# Altium PCB BRK-r1-0-1.PCBDOC
Units mil, origin at the board's own origin, x right, y up, seen from the top; angles counter-clockwise.
Board outline 1840 x 1852.09 mil, 4 copper layers (Top, GND Plane, Mid1-Ver, Bottom), stack 61.6 mil thick; 40 components, 56 nets, 262 pads, 263 vias.
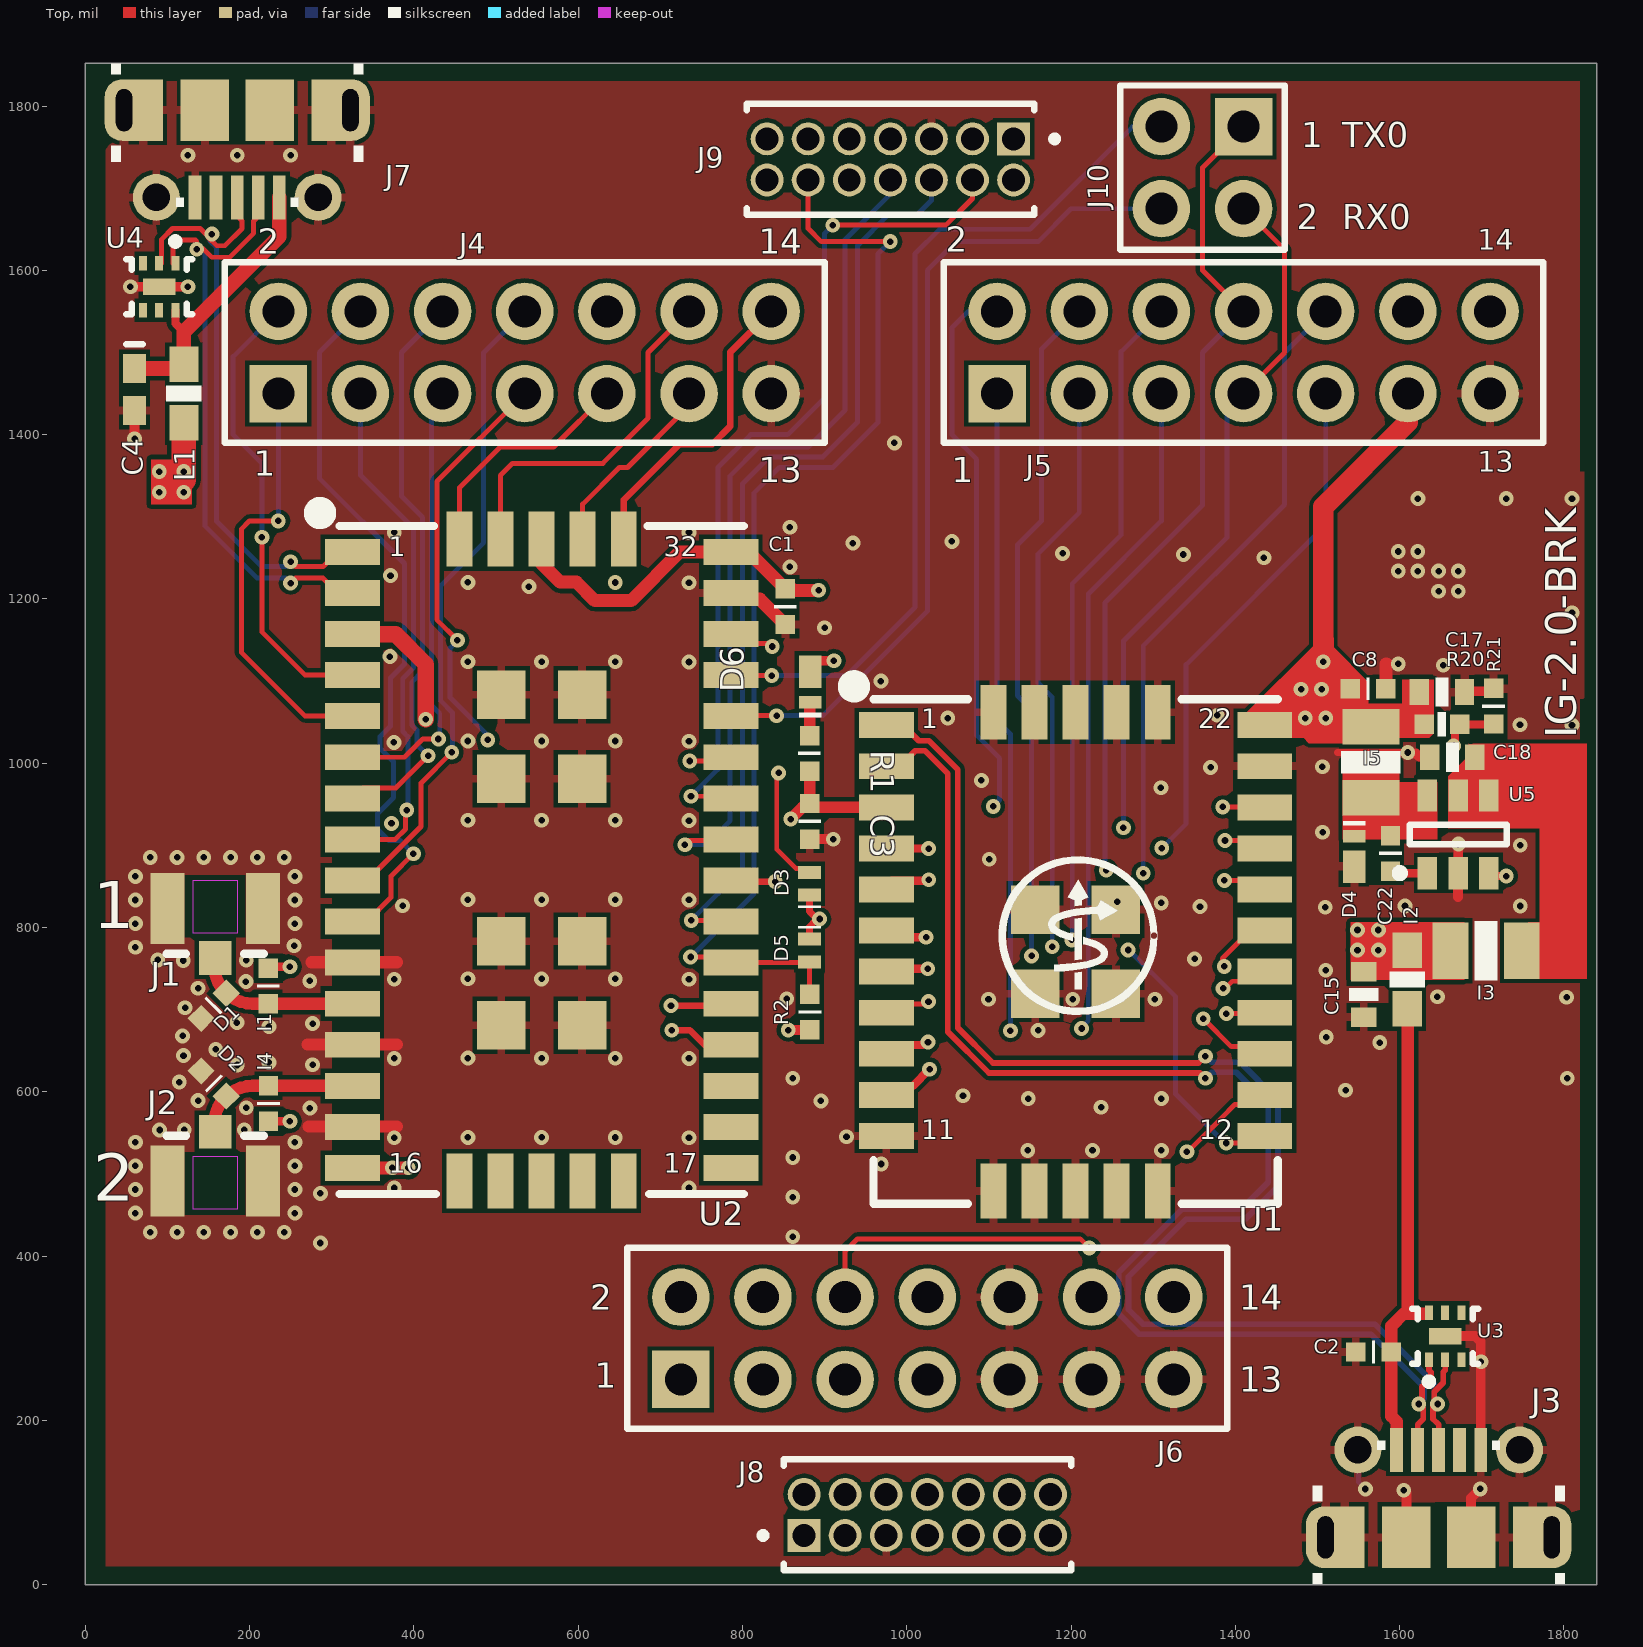
[diagram p0: Top view]
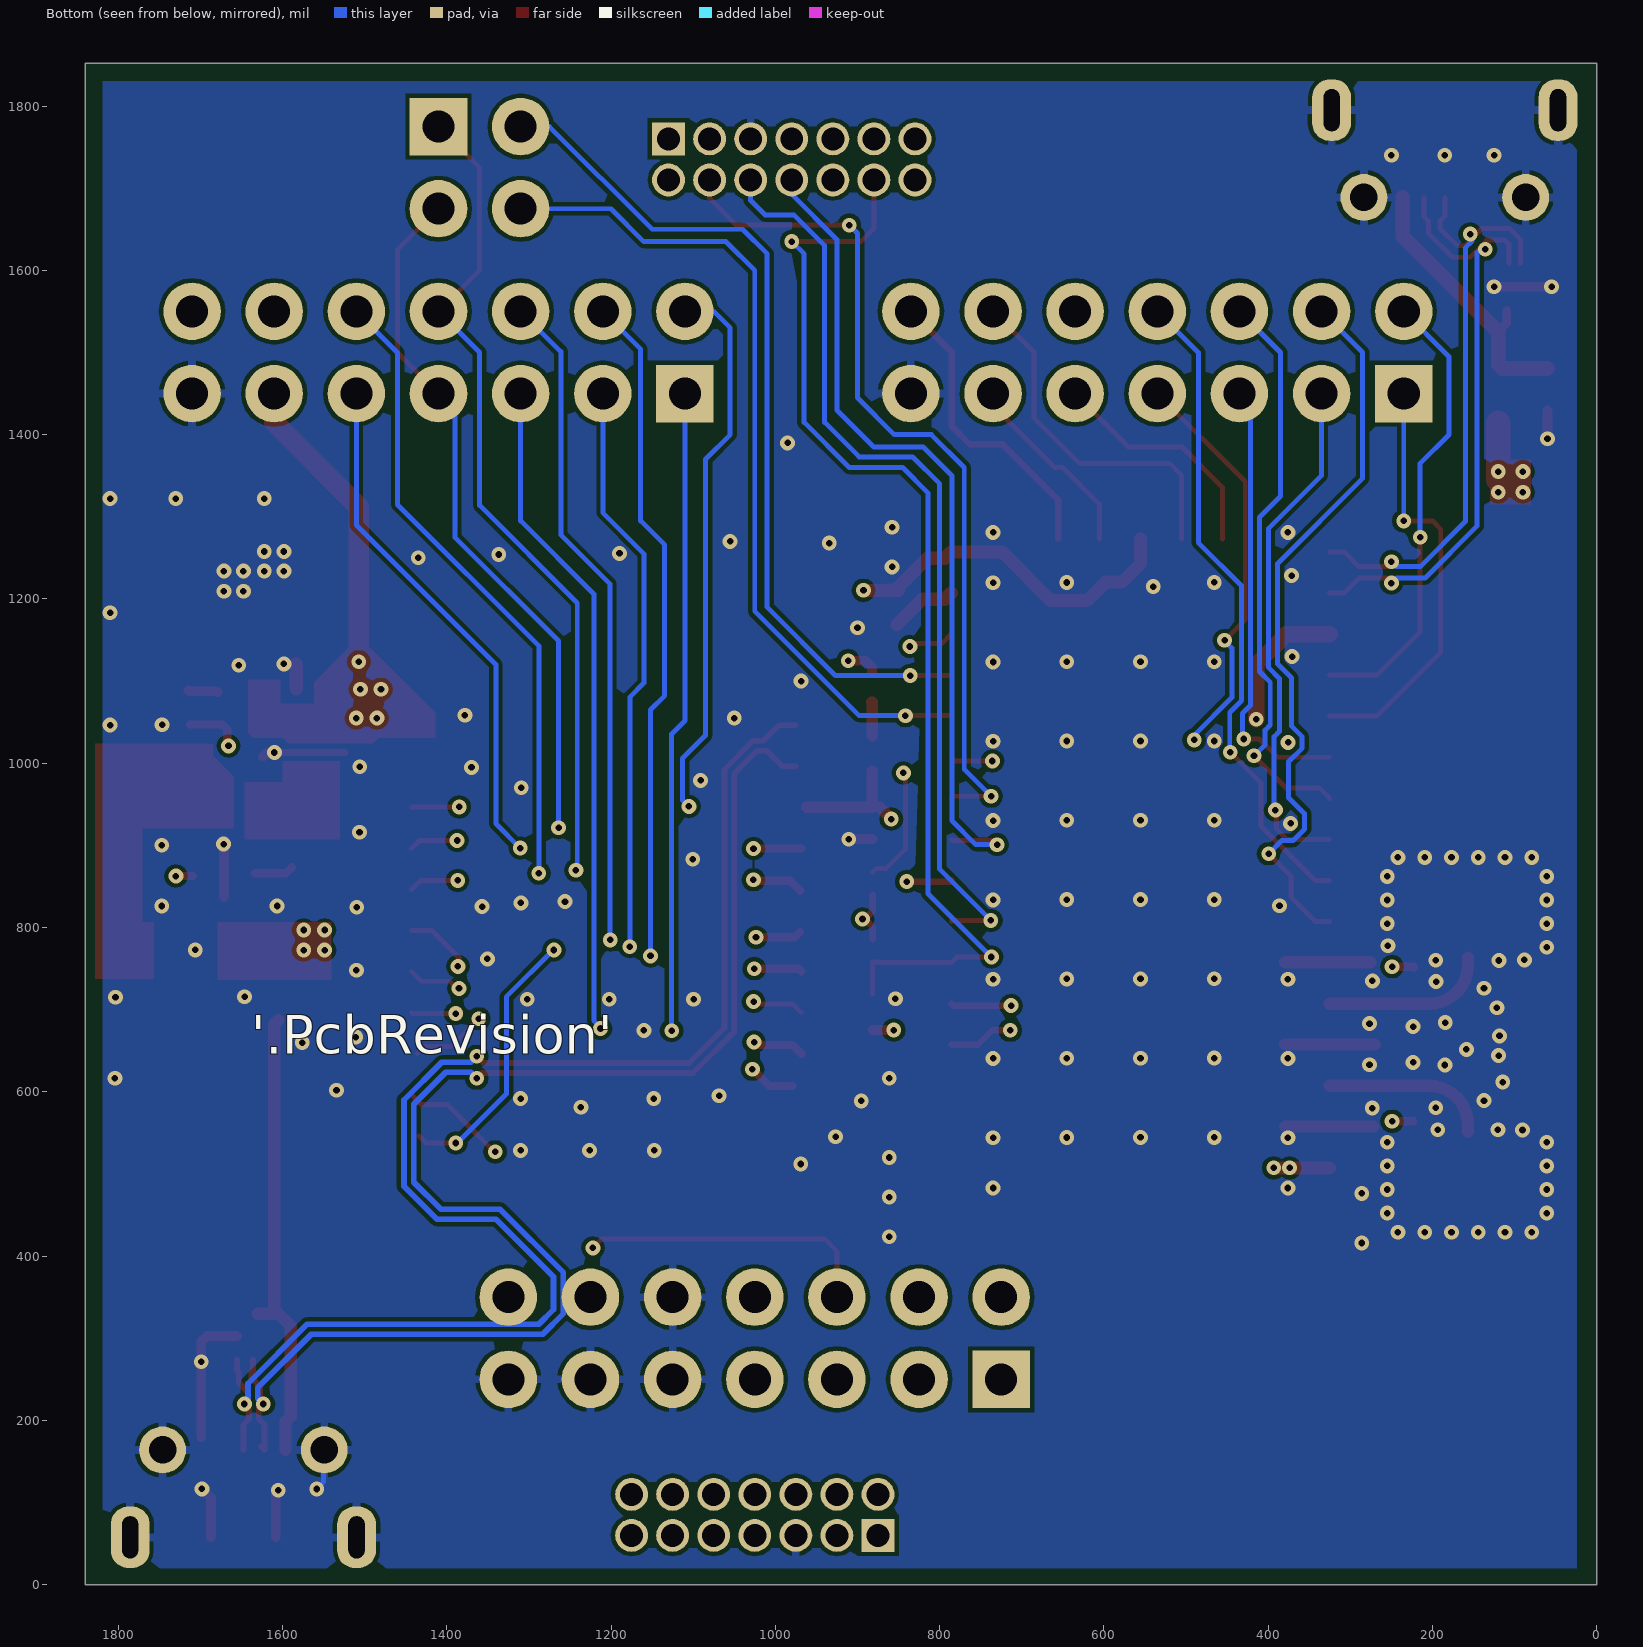
[diagram p1: Bottom view, seen from below]
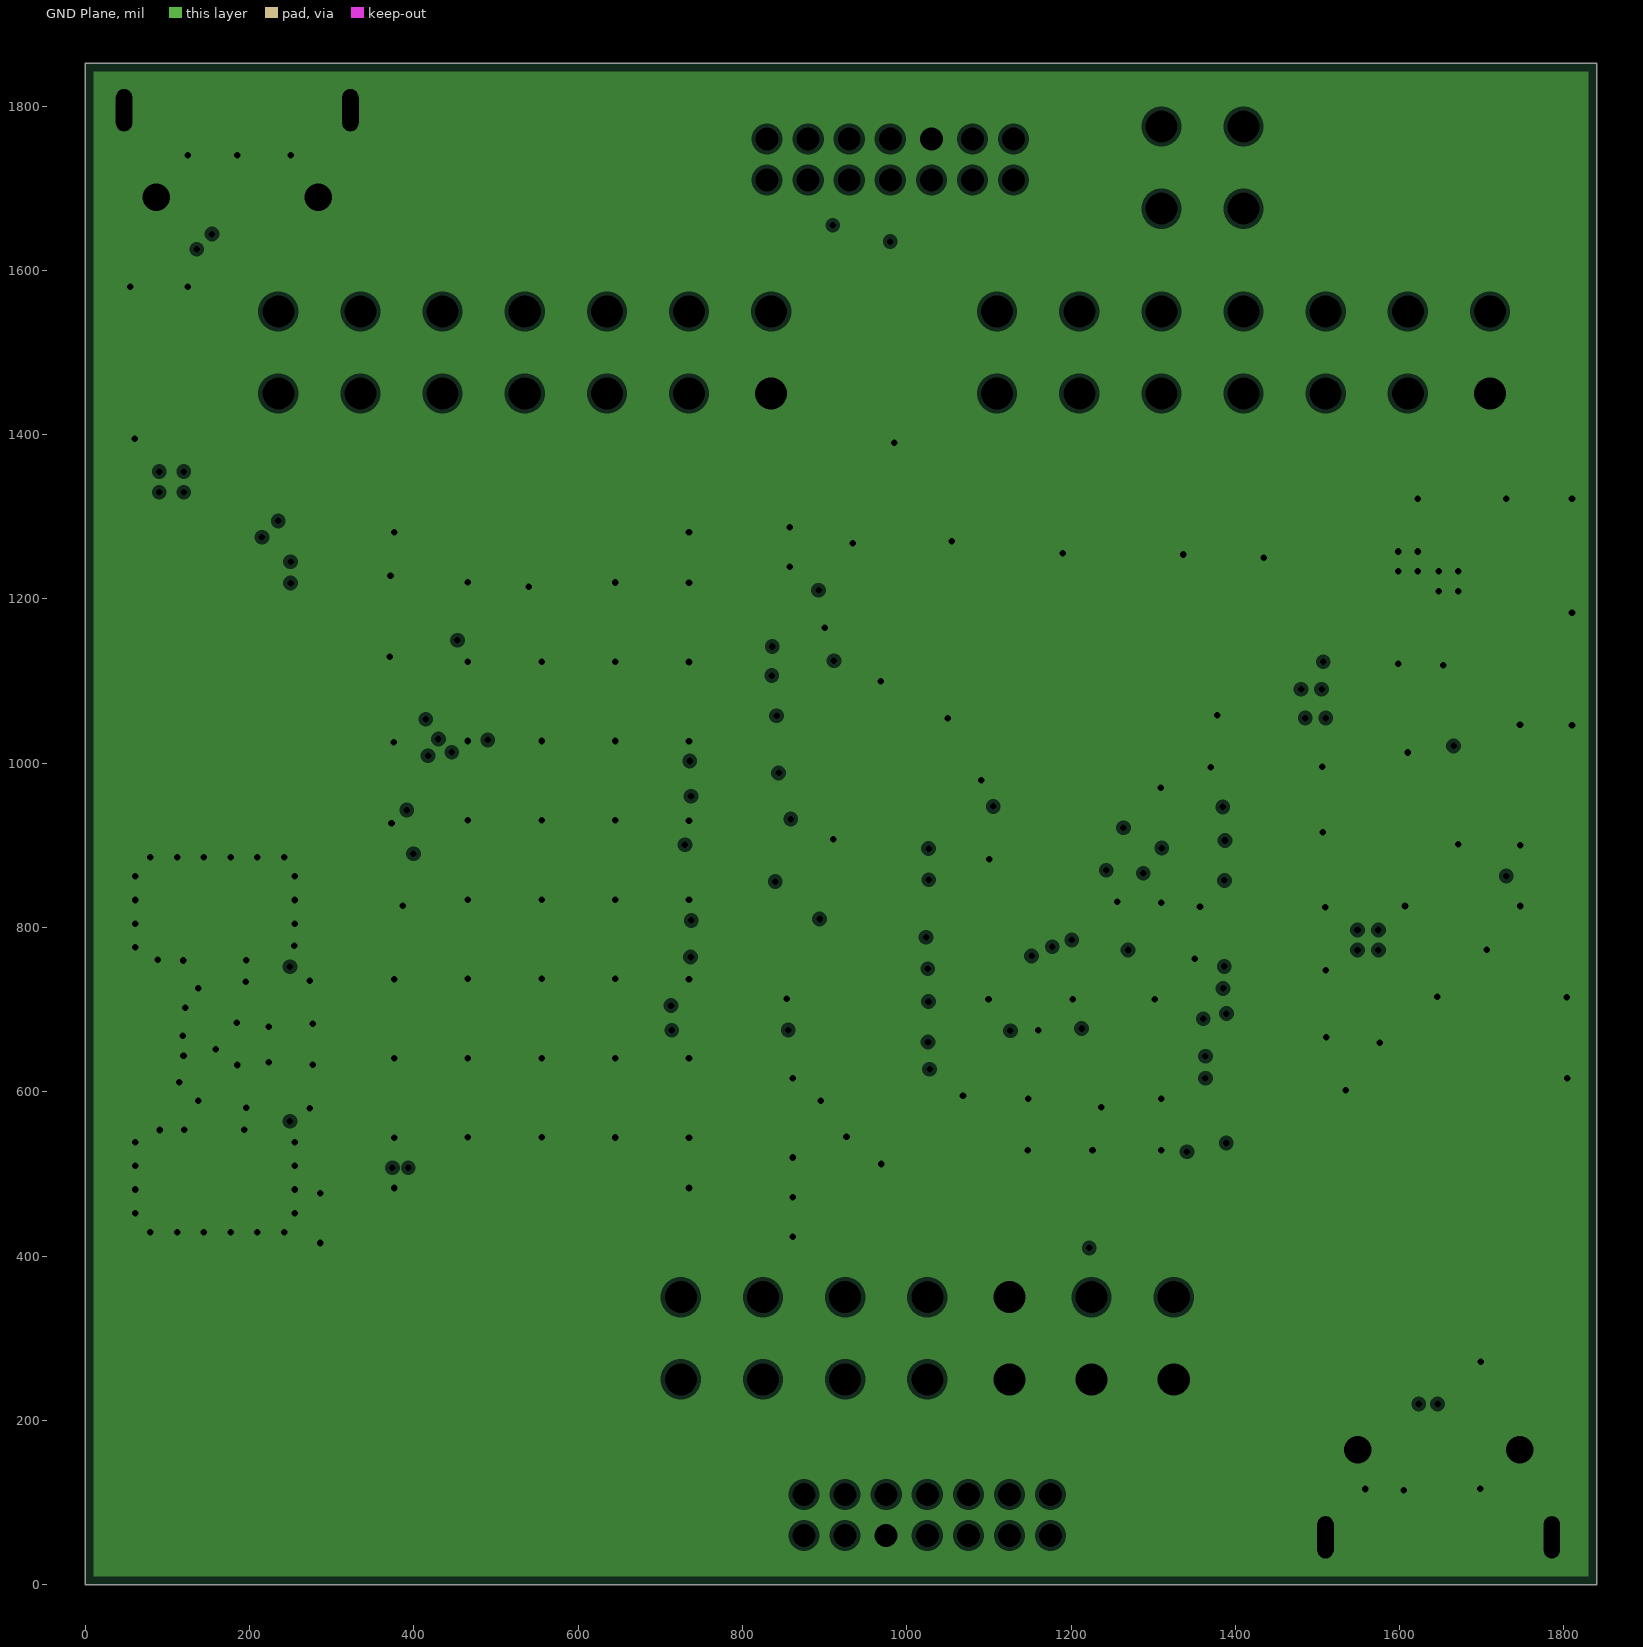
[diagram p2: GND Plane, clearances drawn from the general rule]
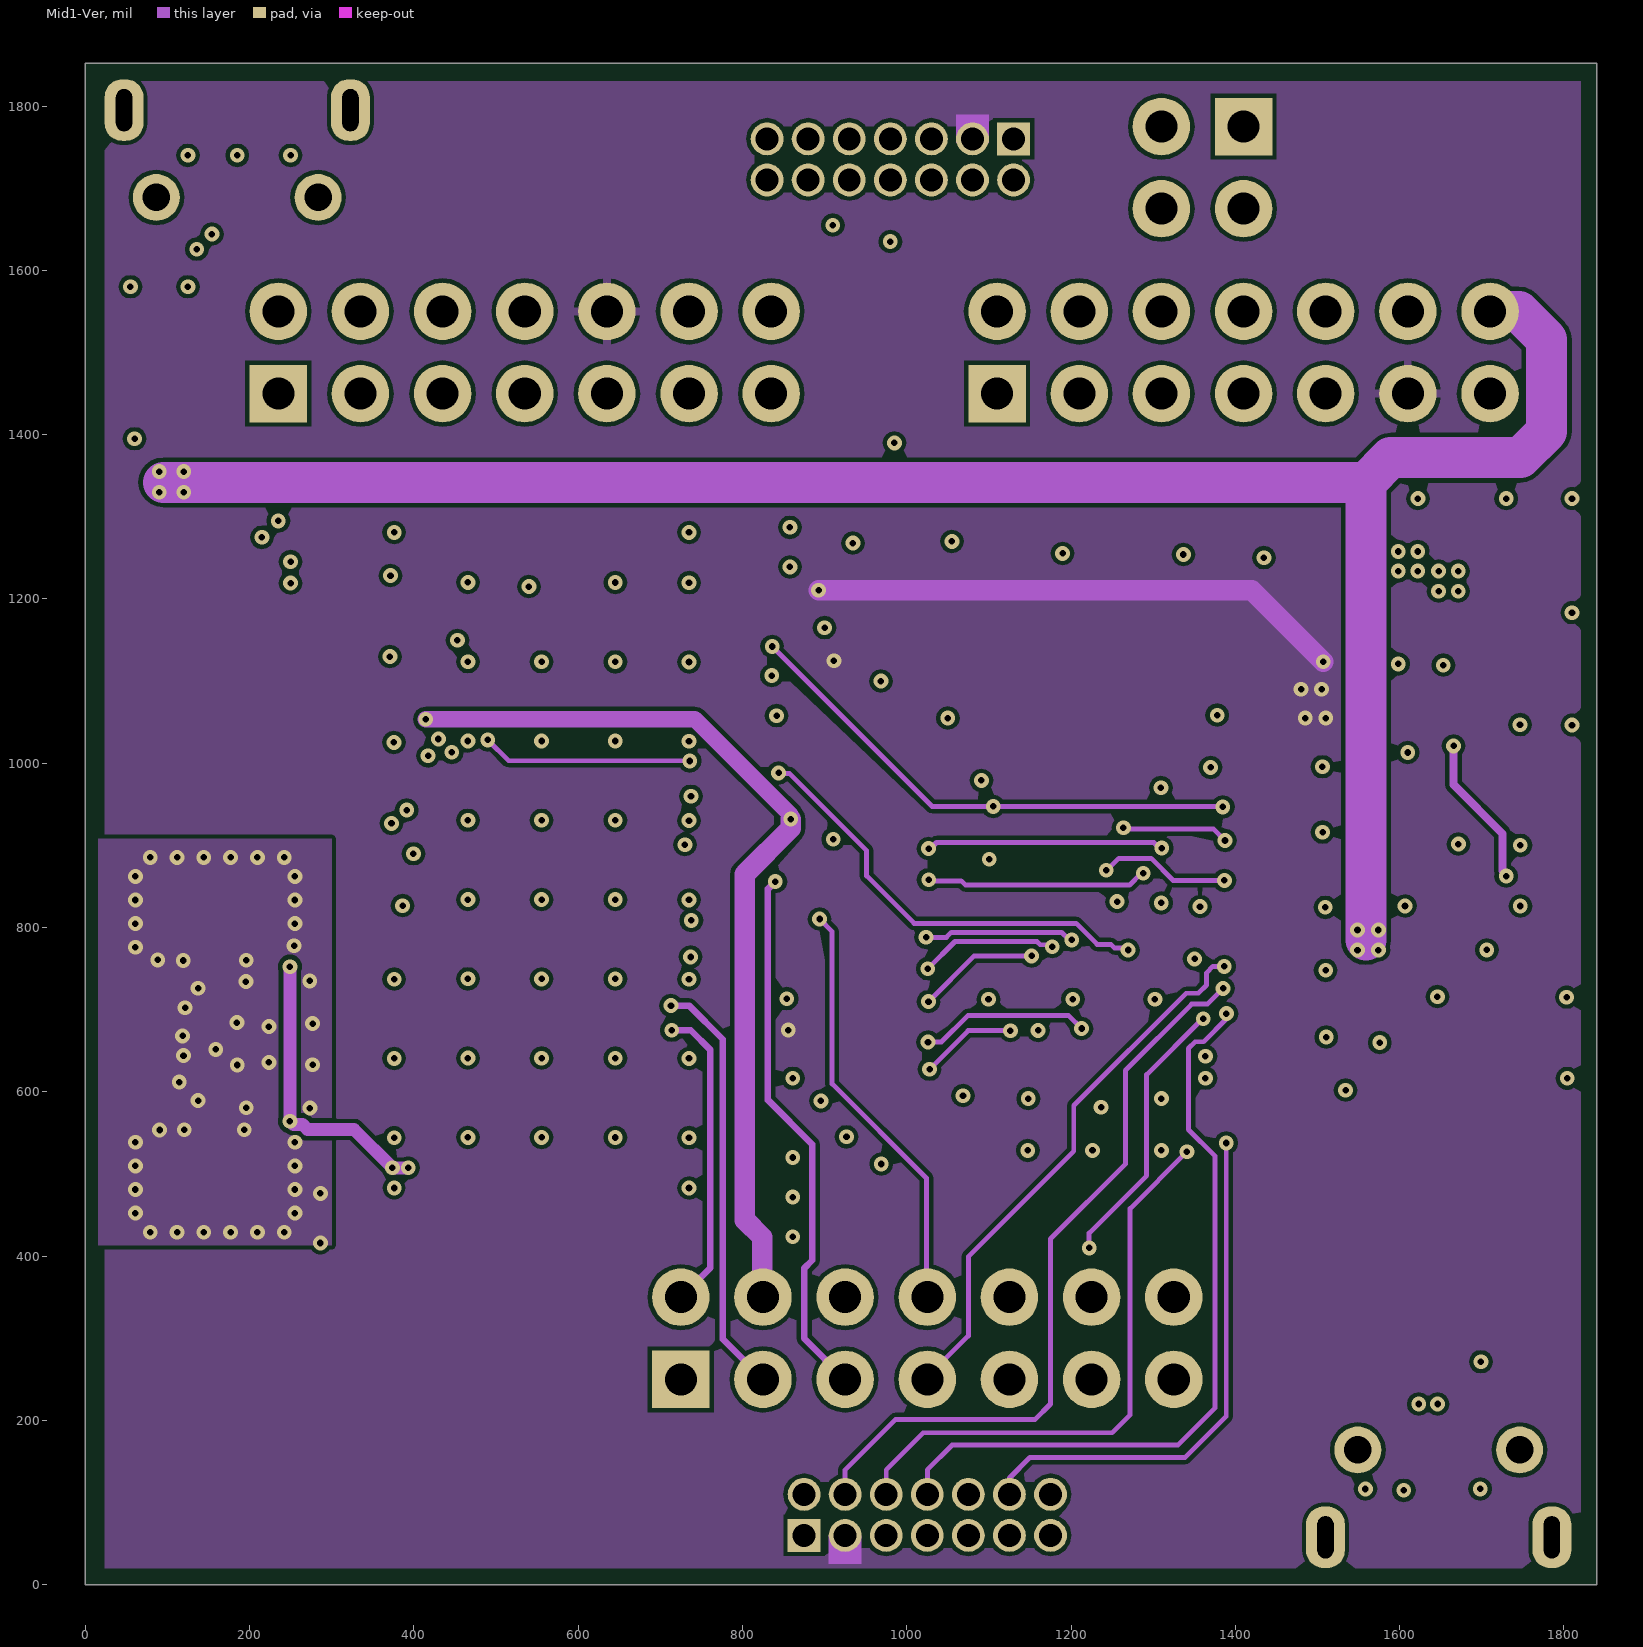
[diagram p3: Mid1-Ver]
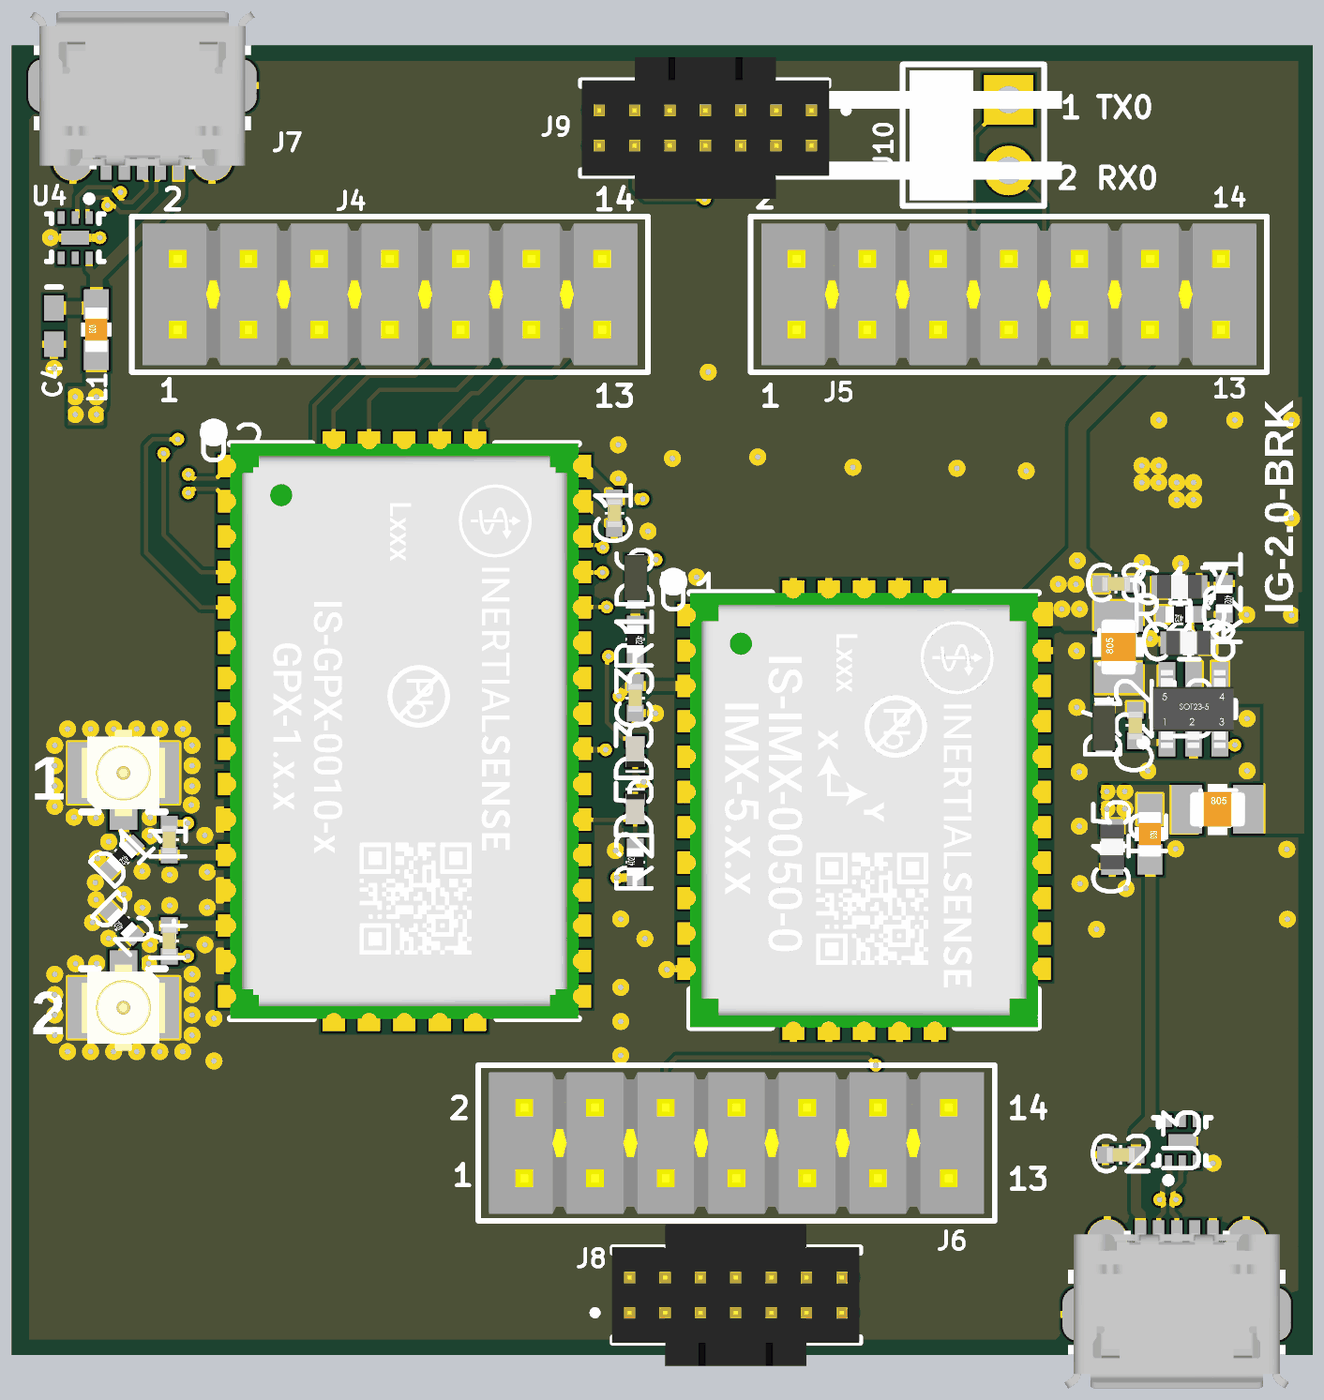
[diagram p4: 3D render of the assembled board from above, using the file's embedded part models]

## Layer stack, top to bottom
Top: signal copper 2.1
Dielectric: prepreg 8, PP-006, Dk 4.1
GND Plane: plane copper 0.7, net GND
Dielectric: core 40, Core-009, Dk 4.5
Mid1-Ver: signal copper 0.7
Dielectric: prepreg 8, PP-006, Dk 4.1
Bottom: signal copper 2.1

## Board outline
0,0 0,1852.09 1840,1852.09 1840,0

## Design rules (kind name [scope] priority, off if disabled: settings)
Clearance "Clearance - GPS Ant" [All vs InNet('GPS1_ANT')] p1: gap=8
Clearance [All] p2: gap=5
ComponentClearance Ignore [InComponent('H7')] p1: gap=-500 collisioncheckmode=3 verticalgap=-500 showdistances=FALSE
ComponentClearance HeaderClearance [InComponent('H1')] p2: gap=10 collisioncheckmode=3 verticalgap=-10 showdistances=FALSE
ComponentClearance Default [All] p3: gap=10 collisioncheckmode=3 verticalgap=10 showdistances=FALSE
DiffPairsRouting [All] p1: maxlimit=8 minlimit=4 mostfreqgap=5 maxuncoupledlength=500
HoleSize [All] p1: absolutevalues=TRUE maxlimit=200 minlimit=8 maxpercent=80.000 minpercent=20.000
HoleToHoleClearance [All] p1: gap=9 allowstackedmicrovias=TRUE
MinimumAnnularRing [All] p1: minimumring=4.5
MinimumSolderMaskSliver [All] p1: minsoldermaskwidth=3
PlaneClearance [All] p1: clearance=5
PlaneConnect "Power Plane Connect Style" [All] p1: planeconnectstyle=Direct reliefexpansion=20 reliefentries=4 reliefconductorwidth=7 reliefairgap=10
PolygonConnect [ISVIA] p1: connectstyle=Direct reliefconductorwidth=10 reliefentries=4 polygonreliefangle="90 Angle"
PolygonConnect "No Thermal Polygon Connect" [All vs InNamedPolygon('+1.8_L-01_P-002') or InNamedPolygon('GND_L01_P044') or InPolygonClass('NO THERMALS')] p2: connectstyle=Direct reliefconductorwidth=10 reliefentries=4 polygonreliefangle="90 Angle"
PolygonConnect "Default Polygon Connect" [All] p3: connectstyle=Relief reliefconductorwidth=10 reliefentries=4 polygonreliefangle="90 Angle"
RoutingCorners "Routing Corners Default" [All] p1: cornerstyle=45-Degree minsetback=100 maxsetback=100
RoutingLayers "Routing Layers Default" [All] p1: top layer_v5=TRUE mid layer 1_v5=TRUE bottom layer_v5=TRUE
RoutingPriority "Routing Priority Default" [All] p1: routingpriority=0
RoutingVias "Via Style Default" [All] p1: holewidth=8 width=18 viastyle="Through Hole" minholewidth=8 minwidth=18 maxholewidth=8 maxwidth=18
SilkToSilkClearance [Not ( ((ObjectKind = 'Text') And ((UseInvertedRectangle = 'True') OR (IsTextInverted = 'True'))) OR (ObjectKind = 'Fill') ) vs Not ( ((ObjectKind = 'Text') And ((UseInvertedRectangle = 'True') OR (IsTextInverted = 'True'))) OR (ObjectKind = 'Fill') )] p1: silktosilkclearance=0.98
SilkscreenOverComponentPads [NOT(IsPad AND OnLayer('Multi-Layer'))] p1: minsilkscreentomaskgap=0
SolderMaskExpansion SolderMaskExpansion_Via [IsVia] p1: expansion=-19.68
SolderMaskExpansion "Solder Mask Expansion" [All] p2: expansion=3
TestPointUsage FabricationTestPointUsage [All] p1 off: valid=0 allowmultiple=FALSE
Testpoint FabricationTestpoint [All] p1 off: side=3 testpointundercomponent=TRUE minsize=40 maxsize=100 preferedsize=60 minholesize=0 maxholesize=40 preferedholesize=32 testpointgrid=1 style=297 order=0123456789
Width "RF GPS" [InNetClass('RF_GPS')] p1: maxlimit=14.96 minlimit=14.88 preferedwidth=14.88
Width "Width Default" [All] p2: maxlimit=150 minlimit=3 preferedwidth=6
12 further rules are at their usual default settings.

## Classes and differential pairs
polygon class "NO THERMALS": RF_GND_L-01_P-001 RF_GND_L-03_P-001
net class RF_GPS: GNSS1_ANT GNSS2_ANT
differential pair class USB: USB.D
differential pair USB.D: +USB.D_P -USB.D_N
differential pair USBGPXD: +USBGPXD_P -USBGPXD_N

## Components (designator, comment, footprint, x,y, rotation, side; value= is the part's Value field where it differs from the comment)
C1 "Cap" 0402#1 852.28,1190.55 r270 top
C2 "Cap" 0402#1 1568.28,283.32 r180 top
C3 "Cap" 0402#1 881.89,929.36 r270 top
C4 "Cap" 0402#2 60,1455 r270 top
C8 "Cap" 0402#1 1561.52,1090.61 r0 top
C15 "Cap" 0603 1556.32,718.59 r270 top
C17 "Cap" 0603 1651.4,1086.69 r0 top
C18 "Cap" 0603 1664.04,1007.28 r180 top
C22 "Cap" 0402#1 1588.82,890.22 r90 top
D1 "Diode - Bidirectional Zener" R0402 156.22,704.72 r225 top
D2 "Diode - Bidirectional Zener" R0402 156.22,610.11 r135 top
D3 "Diode - Schottky" D0402 881.63,853.36 r90 top
D4 "Diode - Schottky" D0603B 1544.66,886.58 r270 top
D5 "Diode - Schottky" D0402 881.63,772.05 r270 top
D6 "Diode - Schottky" D0603B 882.51,1099.01 r90 top
I1 "Inductor" 0402#1 222.91,728.99 r270 top
I2 "Inductor" I0603 1609.3,736.68 r270 top
I3 "Inductor" 0806 1705.18,771.7 r0 top
I4 "Inductor" 0402#1 223.1,585.85 r90 top
I5 "Inductor" 0806 1565.1,1001.29 r90 top
J1 "RF - GND x 2" "RF UMC SMD" 158.12,823.23 r270 top locked
J2 "RF - GND x 2" "RF UMC SMD" 158.12,491.37 r90 top locked
J3 "USB-TYPEAB-4GND" "USB Micro AB R/A THR" 1647.51,57.75 r0 top
J4 "CONN-HDR2X7B 100MIL T/H" "CONN-HDR2X7V M" 535,1500 r90 top
J5 "CONN-HDR2X7B 100MIL T/H" "CONN-HDR2X7V M" 1410,1500 r90 top
J6 "CONN-HDR2X7B 100MIL T/H" "CONN-HDR2X7V M" 1025,300 r90 top
J7 "USB-TYPEAB-4GND" "USB Micro AB R/A THR" 185,1795 r180 top
J8 "CONN-HDR2X7 14P .050MIL T/H" "CONN-HDR2X7 .050 PITCH" 875,60 r0 top
J9 "CONN-HDR2X7 14P .050MIL T/H" "CONN-HDR2X7 .050 PITCH" 1130,1760 r180 top
J10 "CONN-HDR2X2A 100MIL T/H" "CONN-HDR2X2A .100MIL" 1360,1725 r270 top
L1 "Inductor" I0603 120,1450 r90 top
R1 "Res" R0402 881.89,1012.04 r270 top
R2 "Res" R0402 881.88,697.14 r90 top
R20 "Res" R0402 1651.4,1047.32 r180 top
R21 "Res" R0402 1714.66,1069.39 r270 top
U1 "IMX" IS-IMX-5.0 959.41,1077.83 r0 top locked
U2 "GPX" IS-GPX-1.0 309.43,1288.8 r0 top locked
U3 "VBUS053" QFN50P160X160X60-6N 1655.37,302.46 r90 top
U4 "VBUS053" QFN50P160X160X60-6N 90,1580 r270 top
U5 "ADP2301" MO-178-AB 1671.09,913.46 r90 top

## Footprints (in the part's own frame and the unit in brackets; to place one, negate y for a bottom-side part, rotate by r counter-clockwise, add the part's x,y. Pads: shape width x height; smd on the part's side, far side on the other; paste and mask are expansions set on the pad)
0402#1 [mm]
  rect 0.6x0.6 smd: 1(-0.55,0) 2(0.55,0)
  silkscreen extent -0.05,-0.35 0.05,0.35, body extent -0.5,-0.25 0.5,0.25, height 0.51
0402#2 [mm] "Chip Capacitor; Body 1.0 x 0.5 mm (LxW typ)"
  rect 0.9x0.7 smd: 1(-0.65,0) 2(0.65,0)
  silkscreen extent -1.4,-0.25 -1.4,0.25
0603 [mm]
  rect 0.6x0.8 smd: 1(-0.7,0) 2(0.7,0)
  silkscreen extent -0.2,-0.45 0.2,0.45, body extent -0.8,-0.43 0.8,0.43, height 0.87
0806 [mm]
  rect 1.1x1.75 smd: 1(-1.1,0) 2(1.1,0)
  silkscreen extent -0.35,-0.92 0.35,0.92, body extent -1,-0.62 1,0.63, height 0.78
"CONN-HDR2X2A .100MIL" [mil] "CONN-HDR2X2A .100MIL MALE JUMPER"
  rect 70x70 hole 39: 1(-50,50)
  round 70 hole 39: 2(50,50) 3(-50,-50) 4(50,-50)
  silkscreen extent -100,-100 100,100, body extent -92,-96 92,96, height 408
"CONN-HDR2X7 .050 PITCH" [mil]
  rect 40x40 hole 27.95: 1(0,0)
  round 40 hole 27.95: 2(0,50) 3(50,0) 4(50,50) 5(100,0) 6(100,50) 7(150,0) 8(150,50) 9(200,0) 10(200,50) 11(250,0) 12(250,50) 13(300,0) 14(300,50)
  silkscreen extent -54,-43 325,93, body extent -26,-75 324,125, height 225
"CONN-HDR2X7V M" [mil] "Header 2X7 Verticle .100 Samtec Male"
  rect 70x70 hole 39: 1(-50,300)
  round 70 hole 39: 2(50,300) 3(-50,200) 4(50,200) 5(-50,100) 6(50,100) 7(-50,0) 8(50,0) 9(-50,-100) 10(50,-100) 11(-50,-200) 12(50,-200) 13(-50,-300) 14(50,-300)
  silkscreen extent -110,-365 110,365, body extent -100,-350 100,350, height 330
D0402 [mm]
  rect 0.4x0.7 smd: A(0.35,0) C(-0.35,0)
  silkscreen extent -0.76,-0.35 -0.68,0.35, body extent -0.55,-0.33 0.55,0.33, height 0.56
D0603B [mm] "Molded Diode, 2-Leads, Body 1.60x0.80mm, IPC Medium Density"
  rect 1.005x0.69 smd: A(0.312,0)
  rect 0.385x0.69 smd: C(-0.625,0)
  silkscreen extent -1.1,-0.35 -0.95,0.35, body extent -0.86,-0.42 0.86,0.42, height 0.45
I0603 [mm]
  rect 1.1x0.9 smd: 1(-0.9,0) 2(0.9,0)
  silkscreen extent -0.25,-0.55 0.25,0.55, body extent -0.8,-0.4 0.8,0.4, height 0.3
IS-GPX-1.0 [mm] "Inerial Sense GPX-1.0, 42pins 1.27mm pitch"
  rect 1.5x1.5 smd: 0(5,-15.435) 0(5,-12.835) 0(5,-7.815) 0(5,-5.215) 0(7.5,-15.435) 0(7.5,-12.835) 0(7.5,-7.815) 0(7.5,-5.215)
  rect 1.7x0.8 smd paste-2.54: 1(0.4,-0.8) 2(0.4,-2.07) 3(0.4,-3.34) 4(0.4,-4.61) 5(0.4,-5.88) 6(0.4,-7.15) 7(0.4,-8.42) 8(0.4,-9.69) 9(0.4,-10.96) 10(0.4,-12.23) 11(0.4,-13.5) 12(0.4,-14.77) 13(0.4,-16.04) 14(0.4,-17.31) 15(0.4,-18.58) 16(0.4,-19.85) 17(12.1,-19.85) 18(12.1,-18.58) 19(12.1,-17.31) 20(12.1,-16.04) 21(12.1,-14.77) 22(12.1,-13.5) 23(12.1,-12.23) 24(12.1,-10.96) 25(12.1,-9.69) 26(12.1,-8.42) 27(12.1,-7.15) 28(12.1,-5.88) 29(12.1,-4.61) 30(12.1,-3.34) 31(12.1,-2.07) 32(12.1,-0.8)
  rect 0.8x1.7 smd paste-2.54: 33(3.71,-20.25) 34(4.98,-20.25) 35(6.25,-20.25) 36(7.52,-20.25) 37(8.79,-20.25) 38(8.79,-0.4) 39(7.52,-0.4) 40(6.25,-0.4) 41(4.98,-0.4) 42(3.71,-0.4)
  silkscreen extent -0.85,-20.65 12.5,0.65, body extent 0,-20.65 12.5,0, height 2.88
IS-IMX-5.0 [mm] "Inerial Sense IMX-5.0, 22pins 1.27mm pitch"
  rect 1.5x1.5 smd: 0(5,-9.1) 0(5,-6.5) 0(7.5,-9.1) 0(7.5,-6.5)
  rect 1.7x0.8 smd paste-2.54: 1(0.4,-0.8) 2(0.4,-2.07) 3(0.4,-3.34) 4(0.4,-4.61) 5(0.4,-5.88) 6(0.4,-7.15) 7(0.4,-8.42) 8(0.4,-9.69) 9(0.4,-10.96) 10(0.4,-12.23) 11(0.4,-13.5) 12(12.1,-13.5) 13(12.1,-12.23) 14(12.1,-10.96) 15(12.1,-9.69) 16(12.1,-8.42) 17(12.1,-7.15) 18(12.1,-5.88) 19(12.1,-4.61) 20(12.1,-3.34) 21(12.1,-2.07) 22(12.1,-0.8)
  rect 0.8x1.7 smd paste-2.54: 23(3.71,-15.2) 23(4.98,-15.2) 23(6.25,-15.2) 23(7.52,-15.2) 23(8.79,-15.2) 24(3.71,-0.4) 24(4.98,-0.4) 24(6.25,-0.4) 24(7.52,-0.4) 24(8.79,-0.4)
  silkscreen extent -0.85,-15.6 12.5,0.65, body extent 0,-15.6 12.5,0, height 2.89
MO-178-AB [mm] "SOT23, 6-Leads, Body 3.0x2.8mm (max), Pitch 0.95mm, IPC Medium Density"
  rect 1x0.6 smd: 1(-1.2,0.95) 2(-1.2,0) 3(-1.2,-0.95) 4(1.2,-0.95) 5(1.2,0) 6(1.2,0.95)
  silkscreen extent -1.32,-1.5 0.3,1.92, body extent -1.4,-1.45 1.41,1.45, height 1.12
QFN50P160X160X60-6N [mm] "QFN, 6-Leads, Body 1.6x1.6mm (max), Pitch 0.50mm, IPC Medium Density"
  rect 0.45x0.25 smd: 1(-0.725,0.5) 2(-0.725,0) 3(-0.725,-0.5) 4(0.725,-0.5) 5(0.725,0) 6(0.725,0.5)
  rect 0.5x1 smd: 7(0,0)
  silkscreen extent -1.5,-1.02 0.85,1.02, body extent -0.82,-0.82 0.82,0.82, height 0.6
R0402 [mm]
  rect 0.6x0.6 smd: 1(-0.55,0) 2(0.55,0)
  silkscreen extent -0.05,-0.36 0.05,0.34, body extent -0.5,-0.3 0.5,0.3, height 0.2
"RF UMC SMD" [mm] "Ultra Miniature Coaxial Surface Mount"
  rect 1.05x1 smd: 1(1.525,0)
  rect 2.2x1.05 smd: 2(0,-1.475) 3(0,1.475)
  Top pour cut-out: -1.05,0.95 -1.05,-0.95 0.9,-0.95 0.9,0.95
  Top keep-out region: -0.85,0.7 -0.85,-0.7 0.75,-0.7 0.75,0.7
  silkscreen extent 1.4,-1.5 1.4,1.5, body extent -1.55,-1.5 1.55,1.5, height 1.3
"USB Micro AB R/A THR" [mm] "USB Micro AB R/A Through Hole"
  rect 0.4x1.35 smd: 1(-1.3,2.7) 2(-0.65,2.7) 3(0,2.7) 4(0.65,2.7) 5(1.3,2.7)
  rrect90% 1.2x1.9 hole 0.5 slot 1.3 at 90 deg paste-2539.97 mask+0.076: 6(-3.5,0)
  rect 1.2x1.9 smd: 6(-2.9,0) 7(2.9,0)
  round 1.45 hole 0.85 mask+0.102: 6(-2.5,2.7) 7(2.5,2.7)
  rrect90% 1.2x1.9 hole 0.5 slot 1.3 at 90 deg mask+0.076: 7(3.5,0)
  rect 1.5x1.9 smd: 8(-1,0) 9(1,0)
  silkscreen extent -3.9,-1.45 3.9,3, body extent -4.02,-2.65 4.03,2.92, height 2.69

## Part data
C1 C2 C4 C8: "CAP CER .10UF 50V X7R 10% 0402"
C3: "0402 2.2 uF 6.3 V ±10% Tolerance X6S Multilayer Ceramic Capacitor"
C15 C18: "CAP CER 2.2UF 25V X6S 0603"
C17: "CAP CER 22UF 6.3V X6S 0603"
C22: "CAP CER 0.1UF 50V X7R 0402"
D1 D2: "LITTELFUSE - PESD0402-140 - DIODE, ESD PROTECTION, 0402, FULL REEL"
D3 D5: "CDBQR0130L; SMT Schottky Diode; 35V 100mA; 2-Pin SOD-923F (0402)"
D4 D6: "DIODE SCHOTTKY 30V 2A 0603"
I1 I4: "Inductor RF Chip Wirewound 120nH 5% 100MHz 20Q-Factor 110mA 2.66Ohm DCR 0402 Paper T/R"
I2 L1: "FERRITE CHIP 220 OHM 2500MA 0603"
I3 I5: "FIXED IND 2.2UH 1.2A 110 MOHM"
J1 J2: "CONN UMC RCPT STR 50 OHM SMD"
J3 J7: "CONN USB AB 4POS"
J10: "CONN-HDR2X2A 100MIL MALE T/H"
R1 R2: "1 kOhms ±1% 0.063W, 1/16W Chip Resistor 0402 (1005 Metric) Moisture Resistant Thick Film"
R20: "RES TF 30.9K OHM 1% 1/16W 0402"
R21: "RES 10.0K OHM 1/16W 1% 0402 SMD"
U1: library part IS-IMX-5.0, "Inertial Sense IMX"
U2: library part IS-GPX-1.0, "Inertial Sense GPX"
U3 U4: "ESD SUPPRESS 5.5V 36W 3-Line USB"
U5: "IC BUCK ADJ 1.2A 6TSOT"

## Via types
v1: diameter 18, hole 8, Top to Bottom, 263 vias

## Nets (pads, with @x,y where several pads share a name; then routed paths per layer and width w, separated by ;. In a path a pad name is that pad's centre, name@x,y a point inside that pad or via, vN(x,y) a via of type N, cw(c..) or ccw(c..) an arc to the next point about the centre after c; other vN are vias at no path point)
+3.3V: C1.1 C8.1 C17.1 D6.A I5.2 J4.10 J5.11 J8.3 J9.3 R2.1 R20.2 U1.22 U2.32 U2.40 | length 1561.6
  Top w12: v1(855.83,675.2) 855.97,675.34 881.73,675.34 R2.1 ; D6.A 882.51,1117.22 890.09,1124.8 v1(911.34,1124.8)
  Top w16: U2.40 555.49,1242.93 577.95,1220.47 597.95,1220.47 620.4,1198.02 664.48,1198.02 723.76,1257.31 U2.32 793.55,1249.56 814.93,1249.56 C1.1 ; C1.1@850.16,1210.55 C1.1@863.53,1210.55 ; C1.1@863.4,1210.29 863.53,1210.42 892.57,1210.42 v1(892.7,1210.55)
  Top w25: C8.1 v1(1507,1123.47) 1507,1312 1610,1415 J5.11
  Mid1-Ver w25: v1(892.7,1210.55) 1419.93,1210.55 v1(1507,1123.47)
  other v1: 1485,1055 1510,1055 1480,1090 1505,1090
FB: R20.1 R21.2 U5.3 | length 274.8
  Top w10: v1@1665.44,1020.9 1665.44,1023.06 1667.21,1024.84 1667.21,1041.48 R20.1 R21.2@1712.43,1047.32 ; U5.3@1708.81,862.58 v1(1729.68,862.58)
  Mid1-Ver w10: v1(1665.61,1021.07) 1665.61,973.86 1725.28,914.18 1725.28,869.14 1729.68,864.74 v1(1729.68,862.58)
G1/Rx2/RxCAN/SCL: J5.9 U1.4 | length 985
  Top w6: v1@1309.71,897.38 v1(1310.37,896.73)
  Top w10: U1.4@968.27,896.33 968.46,896.13 v1(1026.54,896.13)
  Mid1-Ver w6: v1(1026.54,896.13) 1028.75,896.13 1036.22,903.6 1300.79,903.6 1307.66,896.73 v1(1310.37,896.73)
  Bottom w6: v1(1310.37,896.73) 1340,926.36 1340,1120 1510,1290 J5.9
G2/Tx2TxCAN/SDA/STROBE: J5.10 U1.5 | length 1108.1
  Top w10: U1.5@969.69,844.9 981.87,857.08 1025.6,857.08 v1(1026.69,858.17)
  Mid1-Ver w6: v1(1026.69,858.17) 1027.96,856.89 1066.35,856.89 1071.35,851.89 1228.1,851.89 1228.25,851.75 1271.26,851.75 1285.66,866.16 v1(1287.86,866.16)
  Bottom w6: v1(1287.86,866.16) 1287.86,1142.86 1460,1315 1460,1500 J5.10
G5/SCLK/STROBE: J5.5 U1.9 | length 1083.4
  Top w6: v1@1212.6,677.28 v1(1212.81,677.08)
  Top w10: U1.9@968.27,646.33 979.01,657.08 1020.2,657.08 1023.72,660.6 v1(1025.89,660.6)
  Mid1-Ver w6: v1(1025.89,660.6) 1042.04,660.6 1074.29,692.85 1197.04,692.85 v1(1212.81,677.08)
  Bottom w6: v1@1212.81,677.49 1212.81,678.64 1220.94,686.76 1220.94,1205.94 1310,1295 J5.5
G6/Rx1/MOSI: J5.6 U1.6 | length 1050.3
  Top w10: U1.6@969.85,794.75 976.52,788.08 v1(1023.51,788.08)
  Mid1-Ver w6: v1(1023.51,788.08) 1048.24,788.08 1054.24,794.08 1188.44,794.08 1197.59,784.93 v1(1200.83,784.93)
  Bottom w6: v1(1200.83,784.93) 1201.44,785.54 1201.44,1218.44 1261,1278 1261,1501 J5.6
G7/Tx1/MISO: J5.3 U1.7 | length 927.5
  Top w10: U1.7@968.27,746.33 971.85,749.92 v1(1025.64,749.92)
  Mid1-Ver w6: v1@1026.13,749.92 1026.13,750.41 1058.8,783.08 1158.36,783.08 1162.4,779.04 1174.82,779.04 v1(1177.11,776.75)
  Bottom w6: v1(1177.11,776.75) 1177.11,1080.54 1160,1097.65 1160,1255 1210,1305 J5.3
G8/C\S\/STROBE: J5.4 U1.8 | length 1036.1
  Top w6: U1.8@968.27,696.33 979.01,707.08 1021.48,707.08 1024.27,709.86 v1(1026.43,709.86)
  Mid1-Ver w6: v1@1025.35,709.86 v1(1026.43,709.86) 1082.07,765.5 v1(1151.9,765.5)
  Bottom w6: v1(1151.9,765.5) 1151.9,1065.07 1134.79,1082.17 1134.79,1265.79 1164,1295 1164,1504 J5.4
G9/S\P\I\_\E\N\/STROBE: J5.1 U1.10 | length 957.3
  Top w10: U1.10@979.01,607.08 1007.39,607.08 v1(1027.86,627.55)
  Mid1-Ver w6: v1(1027.86,627.55) 1074.8,674.48 v1(1126.15,674.48)
  Bottom w6: J5.1 1110,1051.78 1126.15,1035.63 v1(1126.15,674.48)
G10/CHIP_ERASE: J6.7 U1.17 | length 752.3
  Top w6: v1(1386.42,752.67) 1384.5,754.58 1384.5,762.5 1384.37,762.63 1418.07,796.33 U1.17@1442.68,796.33
  Mid1-Ver w6: J6.7 1025,253 1075,303 1075,399.37 1203.3,527.67 1203.3,583.3 1340,720 1355,720 1365,730 1365,745 1372.67,752.67 v1(1386.42,752.67)
G11/SWDIO: J8.4 U1.16 | length 983.3
  Top w6: v1(1385.07,725.93) 1387.78,725.93 1396.44,734.58 1430.93,734.58 U1.16@1442.68,746.33
  Mid1-Ver w6: J8.4 925,140 986,201 1156,201 1175,220 1175,421 1266.03,512.03 1266.03,626.03 1346.71,706.71 1365.85,706.71 v1(1385.07,725.93)
G12/SWO: J8.8 U1.15 | length 983.8
  Top w6: v1(1389.1,695.21) 1441.56,695.21 U1.15@1442.68,696.33
  Mid1-Ver w6: J8.8 1025,140 1055,170 1330,170 1375,215 1375,522 1343,554 1343,653 1351,661 1361.5,661 1389.1,688.6 v1(1389.1,695.21)
G13/DRDY/XSDA: J6.6 U1.14 | length 794.2
  Top w6: J6.6 925,406 940,421 1211.09,421 v1(1222.09,410) ; v1(1361,689) 1361.76,689 1361.76,688.24 1395,655 1427.12,655 U1.14
  Mid1-Ver w6: v1(1222.09,410) 1222.09,428.07 1292.03,498.02 1292.03,621.03 1358.47,687.47 1360.06,687.47 1361,688.41 v1(1361,689)
G14/SWCLK: J8.6 U1.13 | length 835.1
  Top w6: v1(1341,527) 1342.14,527 1382.65,567.51 1382.65,567.84 1399.39,584.58 1430.93,584.58 U1.13@1442.68,596.33
  Mid1-Ver w6: J8.6 975,140 1020,185 1250,185 1271.86,206.86 1271.86,457.86 v1(1341,527) v1@1342.14,527
GND: C1.2 C2.2 C3.2 C4.2 C8.2 C15.2 C17.2 C18.2 D1.2 D2.2 D4.A J1.2 J1.3 J2.2 J2.3 J3.5 J3.6 J3.7 J3.8 J3.9 J4.13 J5.13 J6.9 J6.10 J6.11 J6.13 J7.5 J7.6 J7.7 J7.8 J7.9 J8.5 J9.5 R21.1 U1.0 U1.11 U1.21 U1.23 U1.24 U2.0 U2.11 U2.13 U2.15 U2.31 U3.7 U4.7 U5.2 | length 1098.7
  Top w6: v1@925.85,544.52 v1(926.62,545.29)
  Top w9: 1524.36,1013.08 v1@1612.63,1013.08
  Top w11.81: v1(1609.75,1013.08) 1610.94,1011.89 1619.91,1011.89 1623.85,1007.95
  Top w12: v1(55,1580) U4.7 v1(125,1580) ; v1(60,1395) C4.2 ; C3.2 910.32,907.71 v1(910.55,907.48) ; v1@1605,115 1608.14,111.86 J3.8 ; U3.7 1655.83,302.92 1691.71,302.92 1698.74,295.89 J3.5@1698.74,179.74 ; 1671.09,837.33 U5.2 1671.32,866.45 1671.32,901.41 v1(1671.55,901.65) ; C17.2 1679.95,1087.68 1713.41,1087.68 R21.1@1714.4,1088.66 ; J3.9 1686.88,105.54 v1(1698.02,116.68)
  Top w14.88: 270.39,657.78 379.25,657.78 ; 271.97,557.78 379.25,557.78 ; 275.51,757.78 379.25,757.78
  Top w16: U2.31 793.55,1199.56 821.23,1199.56 C1.2@852.09,1168.7 ; C8.2 1583.17,1120.74 1583.9,1120.74
  Bottom w6: J3.6@1550.12,154.69 1550.12,124.79 v1(1558.32,116.59)
  other v1: 1605.01,115 1698.85,271.45 286.19,415.96 861.34,423.62 79.13,429.16 111.73,429.16 144.33,429.16 176.93,429.16 209.53,429.16 242.13,429.16 61.02,452.36 255.21,452.36 861.34,471.85 286.19,476.39 61.02,481.1 255.21,481.1 376.02,482.95 734.96,482.95 61.02,509.84 255.21,509.84 969.04,512.21 861.34,520.08 1147.38,528.72 1226.12,528.72 1310.03,528.72 61.02,538.58 255.21,538.58 376.02,544.15 555.49,544.49 645.23,544.43 734.96,544.15 465.75,544.54 90.47,553.54 120.39,553.94 193.65,553.75 273.49,580.29 195.98,580.71 1236.61,581.37 137.32,589.37 895.52,588.99 1147.93,591.82 1310.03,591.83 1068.48,595.36 1534.13,602.07 114.49,611.81 1803.91,616.45 861.34,616.54 184.96,632.68 276.69,633.07 223.6,635.83 376.02,640.66 465.75,641.06 555.49,641 645.23,640.94 734.96,640.66 119.61,644.09 158.76,651.7 1575.75,659.95 1510.64,666.61 118.43,668.11 1159.92,674.85 223.6,679.44 276.69,683.07 184.57,684.25 121.57,702.36 853.86,713.39 1099.51,712.73 1202.15,712.73 1302.06,712.73 1803.21,715.23 1645.99,715.88 137.32,725.98 195.59,734.25 273.15,735.04 376.02,737.18 645.23,737.46 734.96,737.18 465.75,737.57 555.49,737.51 1509.91,747.97 119.21,759.84 196.06,760.24 88.19,760.66 1350.42,761.78 1706.11,772.81 61.02,776.01 254.25,777.95 61.02,804.75 255.21,804.75 1356.99,825.46 1509.55,824.61 1606.54,826.26 1746.92,826.21 386.27,826.65 1309.72,829.93 1255.98,831.53 61.02,833.49 255.21,833.49 465.75,834.08 555.49,834.03 645.23,833.97 734.96,833.69 61.02,862.23 255.21,862.23 1100.52,883.25 79.13,885.43 111.73,885.43 144.33,885.43 176.93,885.43 209.53,885.43 242.13,885.43 1746.92,900.11 1506.13,916.08 372.76,926.77 645.23,930.48 734.96,930.2 465.75,930.6 555.49,930.54 1309.31,970.23 1090.91,979.08 1369.8,994.89 1505.91,995.74 375.77,1025.36 465.75,1027.11 555.49,1027.05 645.23,1027.05 734.96,1026.72 1809.77,1046.42 1746.53,1046.94 1050,1055 1377.88,1058.55 968.58,1100.04 1653.13,1119.4 1598.2,1120.86 734.96,1123.23 465.75,1123.62 555.49,1123.57 645.23,1123.51 370.88,1129.85 900,1165 1809.77,1183.29 1647.43,1209.47 1671.22,1209.47 540,1215 465.75,1220.13 645.23,1220.02 734.96,1219.74 371.55,1228.47 1598.21,1233.87 1621.99,1233.87 1647.43,1233.87 1671.22,1233.87 857.8,1238.98 1434.71,1250.21 1336.71,1254.11 1189.71,1255.41 1598.21,1257.77 1621.99,1257.77 934.44,1267.98 1055,1270 376.02,1280.94 734.96,1280.94 857.8,1287.2 1622.15,1322.13 1729.72,1322.13 1809.77,1322.13 985,1390 125,1740 185,1740 250,1740
GNSS1_ANT: D1.1 I1.2 J1.1 U2.12 | length 204
  Top w14.88: J1.1@156.76,763.19 156.76,754.55 ccw(c204.01,754.55) 204.01,707.3 U2.12
GNSS1_PPS: J5.2 U1.20 U2.30 | length 1417.1
  Top w6: U2.30 797.55,1145.56 830,1145.56 833.44,1142.13 v1(836.14,1142.13) ; v1(1384.78,946.84) 1442.17,946.84 U1.20@1442.68,946.33
  Mid1-Ver w6: v1(836.14,1142.13) 1030.8,947.47 v1(1105.2,947.47) 1105.27,947.4 v1@1384.78,947.4
  Bottom w6: v1(1105.2,947.47) 1113,955.27 1113,1006 1085,1034 1085,1370 1055,1400 1055,1530 1075,1550 J5.2
GNSS2_ANT: D2.1 I4.2 J2.1 U2.14 | length 204
  Top w14.88: J2.1@156.76,551.41 156.76,560.06 cw(c204.01,560.06) 204.01,607.3 U2.14
GNSS2_PPS: J6.3 U2.21 | length 588
  Top w8: v1(713,705) 783.5,705 U2.21
  Mid1-Ver w8: v1(713,705) 735,705 776,664 776,299 J6.3
GPX_G5/SCLK: J4.8 U2.9 | length 801.8
  Top w6: U2.9 342.89,857.31 408.65,923.07 408.65,975.83 v1(446.11,1013.28)
  Bottom w6: v1(446.11,1013.28) 446.84,1014.02 446.84,1061.78 432.55,1076.07 432.55,1216.13 485,1268.58 485,1500 J4.8
GPX_G6/Rx1/MOSI: J4.5 U2.6 | length 544.7
  Top w6: U2.6 388.55,1007.3 410.79,1029.54 v1(429.84,1029.54)
  Bottom w6: v1(429.84,1029.54) 431.49,1031.19 431.49,1060.58 421.55,1070.52 421.55,1436.55 J4.5
GPX_G7/Tx1/MISO: J4.6 U2.7 | length 699.4
  Top w6: U2.7 337.92,970.05 378.32,970.05 v1(417.27,1009.01)
  Bottom w6: v1(417.27,1009.01) 403.77,1022.51 403.77,1040.22 397.49,1046.5 397.49,1098.62 410.55,1111.69 410.55,1299.45 385,1325 385,1500 J4.6
GPX_G8/C\S\: J4.3 U2.8 | length 636
  Top w6: U2.8 377.34,907.3 389.76,919.73 389.76,941.45 v1(391.26,942.95)
  Bottom w6: J4.3 335,1350.47 399.55,1285.92 399.55,1116.24 386.49,1103.18 386.49,1038.68 392.77,1032.4 392.77,944.47 v1(391.26,942.95)
GPX_G9/S\P\I\_\E\N\: J4.4 U2.10 | length 901.1
  Top w6: U2.10 342.89,807.31 372.25,836.66 372.25,862.62 v1(399.46,889.83)
  Bottom w6: J4.4 285,1500 285,1346.72 388.55,1243.17 388.55,1120.8 371.56,1103.81 371.56,1045.19 358.77,1032.4 358.77,1018.32 374.89,1002.19 375.28,1002.19 375.28,958.19 355.76,938.67 355.76,919.73 369.56,905.93 383.36,905.93 v1(399.46,889.83)
GPX_G10/BOOT: J4.7 U2.27 | length 807.3
  Top w6: v1(453.07,1149.61) 427.95,1174.73 427.95,1342.95 J4.7 ; v1(735.75,1002.76) 781.26,1002.76 U2.27
  Mid1-Ver w6: v1(490.08,1028.35) 515.42,1003.01 735.5,1003.01 v1(735.75,1002.76)
  Bottom w6: v1(453.07,1149.61) 453.07,1148.96 444.2,1140.09 444.2,1079.98 490.08,1034.1 v1(490.08,1028.35)
GPX_G11/SWDIO: J9.4 U2.26 | length 1048.5
  Top w6: v1(737.32,959.84) 783.27,959.84 U2.26 ; v1(910,1655) 1047.52,1655 1080,1687.48 J9.4
  Bottom w6: v1(737.32,959.84) 770,992.52 770,1360 810,1400 855,1400 900,1445 900,1645 v1(910,1655)
GPX_G12/SWO: J9.8 U2.25 | length 1024.3
  Top w6: v1(730,900.91) 730,905.87 730.04,905.91 784.41,905.91 U2.25
  Bottom w6: v1(730,900.91) 755.91,900.91 785,930 785,1350 820,1385 880,1385 925,1430 925,1637.48 980,1692.48 J9.8
GPX_G13_DRDY: J6.5 U2.24 | length 711.7
  Top w8: U2.24 787.11,856 v1(840,856)
  Mid1-Ver w8: v1(840,856) 831,847 831,590 885,536 885,395 875,385 875,300 J6.5
GPX_G16/QDEC0.A: J4.14 U2.38 | length 374.7
  Top w8: U2.38 655.49,1320.49 723.33,1388.33 763.33,1388.33 785,1410 785,1500 J4.14
GPX_G17/QDEC0.B: J4.11 U2.39 | length 236.4
  Top w6: U2.39 605.49,1315.49 650,1360 660,1360 735,1435 J4.11
GPX_G18/QDEC1.A: J4.12 U2.41 | length 436.4
  Top w6: U2.41 505.49,1350.49 520,1365 630,1365 685,1420 685,1500 J4.12
GPX_G19/QDEC1.B: J4.9 U2.42 | length 289.4
  Top w6: U2.42 455.49,1335.49 505,1385 570,1385 J4.9
GPX_G20_LNA_EN: J6.2 U2.20 | length 452
  Top w8: v1(714,675) 736,675 753.69,657.31 U2.20
  Mid1-Ver w8: v1(714,675) 737,675 761,651 761,386 J6.2
GPX_nRESET: D5.A J9.12 R2.2 U2.22 | length 1362.8
  Top w6: v1(736.93,764.17) 778.94,764.17 U2.22 874.76,757.31 875.73,758.27 D5.A 881.63,719.03 R2.2 ; J9.12 880,1650.96 895.96,1635 v1(980,1635)
  Bottom w6: v1(736.93,764.17) 814.27,841.51 814.27,1329.27 845,1360 910,1360 965,1415 965,1620 v1(980,1635)
GPX_Rx: J5.7 J10.2 U1.19 | length 1046.6
  Top w6: v1(1387.42,905.96) 1433.05,905.96 U1.19@1442.68,896.33 ; J5.7 1460,1500 1460,1625 J10.2
  Mid1-Ver w6: v1@1261.9,919.72 v1(1263.78,921.6) ; v1@1263.78,919.72 1373.65,919.72 v1(1387.42,905.96)
  Bottom w6: v1(1263.78,921.6) 1263.78,1148.78 1390,1275 1390,1430 J5.7
GPX_RX0: J10.4 U2.28 | length 1023.2
  Top w6: U2.28 786.37,1057.87 v1(841.59,1057.87)
  Bottom w6: v1(841.59,1057.87) 897.87,1057.87 1025,1185 1025,1600 1060,1635 1160,1635 1200,1675 J10.4
GPX_RX2: J4.2 U2.4 | length 559.3
  Top w6: v1(215,1275) 215,1160 267.69,1107.31 U2.4
  Bottom w6: v1(215,1275) 215,1365 180,1400 180,1495 J4.2
GPX_SWCLK: J9.6 U2.23 | length 1129.6
  Top w6: v1(737.72,808.66) 784.45,808.66 U2.23
  Bottom w6: v1(737.72,808.66) 800,870.94 800,1340 833,1373 898,1373 940,1415 940,1630 977.48,1667.48 1012.48,1667.48 1030,1685 J9.6
GPX_Tx: J5.8 J10.1 U1.18 | length 1238.8
  Top w6: v1@1241.13,871.4 v1(1242.78,869.75) ; v1(1386.7,857.32) 1431.68,857.32 U1.18@1442.68,846.33 ; J5.8 1360,1600 1360,1725 J10.1
  Mid1-Ver w6: v1(1242.78,869.75) 1243.67,869.75 1258.08,884.16 1297.48,884.16 1324.32,857.32 v1(1386.7,857.32)
  Bottom w6: v1@1241.13,871.4 1241.13,1195 1360,1313.87 1360,1500 J5.8
GPX_TX0: J10.3 U2.29 | length 1053.2
  Top w6: U2.29 786.42,1106.69 v1(835.75,1106.69)
  Bottom w6: v1(835.75,1106.69) 926.69,1106.69 1010,1190 1010,1620 1040,1650 1150,1650 1275,1775 J10.3
GPX_TX2: J4.1 U2.5 | length 521.5
  Top w6: v1(235,1295) 200,1295 190,1285 190,1135 267.7,1057.3 U2.5
  Bottom w6: v1(235,1295) J4.1
IMX_nRESET: D3.A J8.12 U1.12 | length 1660.1
  Top w6: v1(844.02,988.19) 841.77,985.94 841.77,895.24 865.01,872.01 876.76,872.01 D3.A ; v1(1388.89,537.72) 1425,537.72 U1.12@1433.61,546.33
  Mid1-Ver w6: v1(844.02,988.19) 844.45,987.76 857.05,987.76 951.16,893.65 951.16,862.99 1009.06,805.08 1206.14,805.08 1231.69,779.53 1248.49,779.53 1253.07,774.94 1267.19,774.94 v1(1269.49,772.65) ; J8.12 1125,130 1150,155 1338.89,155 1388.89,205 v1(1388.89,537.72)
  Bottom w6: v1(1269.49,772.65) 1270.45,772.65 1327.33,715.76 1327.33,597.36 1386.98,537.72 v1(1388.89,537.72)
NetC22_1: C22.1 U5.1 | length 48.3
  Top w10: C22.1@1588.59,873.51 1588.59,873.26 1595.63,866.22 U5.1
NetD6_C: D6.C R1.1 | length 41
  Top w14: R1.1 882.2,1034 882.2,1074.1 D6.C
nRESET: D3.C D5.C J6.8 | length 582.4
  Top w8: D5.C 881.63,801.06 889.02,808.45 891.97,808.45 v1(893.88,810.37) 891.97,812.28 889.06,812.28 881.63,819.71 D3.C
  Mid1-Ver w6: v1@893.32,810.94 909.16,795.09 909.16,609.81 1024,494.96 J6.8@1024,350
SW: C22.2 D4.C I5.1 U5.6
USB.D_N: J3.2 J6.12 U1.2 U3.1 | length 1796.5
  Top w6.97: J3.2 J3.2@1626,168.13
  Top w7: U1.2 991.33,996.33 1010.33,1015.33 ; 1020,1015.33 1010.33,1015.33 ; v1(1363.51,616.55) 1357.06,623 1100.03,623 1050,673.03 1050,987.49 1022.16,1015.33 1010.33,1015.33 ; J3.2 1621.92,194.99 1628.72,201.79 1628.72,215 1628.72,214.5 v1(1623.22,220) 1627.22,224 1627.22,241.21 1638.03,252.02 ; U3.1 1635.68,260.99 1638.03,258.65 ; 1638.03,252.02 1638.03,258.65 ; 1638.03,252.02 1638.03,258.65
  Bottom w7: v1(1363.51,616.55) 1370.87,623.91 1385,623.91 1401.09,623.91 1440,585 1440,490 1407,457 1335.03,457 1258,379.97 1258,330.03 1283.03,305 1565,305 1630,240 1630,226.78 v1(1623.22,220) v1@1628.72,220
USB.D_P: J3.3 J6.14 U1.1 U3.2 | length 1811.1
  Top w7: U1.1 995.59,1046.33 1014.59,1027.33 ; 1026.83,1027.33 1014.59,1027.33 ; v1(1363.51,643.27) 1355.23,635 1105,635 1062,678 1062,992.46 1027.13,1027.33 1014.59,1027.33 ; v1@1640.72,219.97 1640.72,201.79 1647.51,194.99 J3.3 J3.3@1648,164.54 ; v1(1646.22,220) 1642.22,220 1642.22,235 1653.03,245.81 1653.03,258.65 ; 1653.03,248 1653.03,258.65 ; U3.2 1655.37,260.99 1653.03,258.65
  Bottom w7: v1(1363.51,643.27) 1370.87,635.91 1385,635.91 1406.06,635.91 1452,589.97 1452,485.03 1411.97,445 1340,445 1270,375 1270,335 1288,317 1569.97,317 1642,244.97 1642,224.22 v1(1646.22,220)
USB.VBUS: C2.1 I2.2 J3.1 U3.6 | length 559.4
  Top w15: J3.1 1596.33,198.67 1589.93,205.07 C2.1 1589.93,314.93 1605,330 1630,330 ; I2.2@1604.93,687.48 1610,682.41 1610,330
USB.VBUS2: C4.1 J7.1 L1.2 U4.6 | length 344.1
  Top w10: U4.6 109.68,1535.31 120,1525
  Top w18: C4.1 115.16,1480.59 L1.2 120,1525 236.18,1641.18 J7.1
USBGPXD_N: J7.2 U2.2 U4.1 | length 758.6
  Top w6: U4.1@107,1608.54 107,1632 112,1637 134,1637 135.76,1635.24 v1(135.76,1625.76) 144.24,1625.76 154.1,1615.9 175.7,1615.9 205,1645.2 205,1660 210.59,1665.59 J7.2 ; v1(250,1219.3) 256,1225.3 289.46,1225.3 307.46,1207.31 U2.2
  Bottom w6: v1(135.76,1625.76) 141.76,1625.76 146,1621.51 146,1288.51 209.2,1225.3 244,1225.3 v1(250,1219.3)
USBGPXD_P: J7.3 U2.1 U4.2 | length 756.1
  Top w6: U4.2@93,1608.54 93,1637.8 106.2,1651 139.8,1651 149.76,1641.04 151.04,1641.04 v1(154.14,1644.14) 150,1640 150,1639.8 159.9,1629.9 169.9,1629.9 191,1651 191,1660 185,1666 J7.3 ; v1(250,1245.3) 256,1239.3 289.46,1239.3 307.46,1257.3 U2.1
  Bottom w6: v1(154.14,1644.14) 151.66,1641.66 151.66,1635.66 160,1627.31 160,1294.3 215,1239.3 244,1239.3 v1(250,1245.3)
VANT: I1.1 I4.1 U2.16 | length 477
  Top w10: I1.1 222.91,752.36 v1(249.16,752.36) ; I4.1 v1@248.35,564.17
  Top w15.75: U2.16@325.18,507.48 v1(373.94,507.48) v1(393.23,507.48)
  Mid1-Ver w15.75: v1(249.16,752.36) v1(249.16,564.18) 249.77,564.18 253.49,560.46 264.27,560.46 270.51,554.22 327.2,554.22 v1(373.94,507.48) v1(393.23,507.48)
VBAT: C3.1 J6.4 R1.2 U1.3 U2.3 | length 1421.9
  Top w14: v1(858.77,932) C3.1@872.91,946.14 ; C3.1@881.89,946.14 U1.3@961.57,946.14 ; C3.1 R1.2
  Top w20: U2.3 325.64,1156.84 378.19,1156.84 414.49,1120.54 v1(414.49,1053.54)
  Mid1-Ver w20: v1(414.49,1053.54) 742.07,1053.54 858.77,936.84 v1(858.77,932)
  Mid1-Ver w25: J6.4@824,350 824,423 803,444 803,865.11 858.77,920.88 v1(858.77,932)
VIN: C15.1 I2.1 I3.1 J5.14 L1.1 | length 2511.6
  Top w30: 120,1345 L1.1
  Mid1-Ver w50: 95,1341.91 1558.91,1341.91 ; 1558.91,784.72 1558.91,1341.91 ; J5.14@1730,1550 1745,1550 1779,1516 1779,1404 1747,1372 1589,1372 1558.91,1341.91
  other v1: 1548.67,772.5 1574.1,772.5 1548.67,797.02 1574.1,797.02 90,1330 120,1330 90,1355 120,1355
VIN_P: C18.1 I3.2 U5.4 U5.5
pads on no net: J3.4 J5.12 J6.1 J7.4 J8.1 J8.2 J8.7 J8.9 J8.10 J8.11 J8.13 J8.14 J9.1 J9.2 J9.7 J9.9 J9.10 J9.11 J9.13 J9.14 U2.17 U2.18 U2.19 U2.33 U2.34 U2.35 U2.36 U2.37 U3.3 U3.4 U3.5 U4.3 U4.4 U4.5

## Polygon pours and split planes (outlines as drawn)
GND on Top "GND_L01_P014" (solid, remove dead copper, pour order 1004): 24.72,22.48 24.72,1830 1818.97,1830 1818.97,22.48
GND on Top "NONET_L-01_P-001" (solid, pour order 1005): 1597.78,1354.72 1597.78,1148.84 1571.36,1122.42 1571.36,1078.8 1823.66,1078.8 1824.63,1079.78 1824.63,1354.72
GND on Top "RF_GND_L-01_P-001" (solid, pour order 1002): 24.72,907.87 300.03,907.87 300.03,420.08 24.72,420.08
+3.3V on Mid1-Ver "+3.3V_L03_P010" (solid, remove dead copper, pour order 1001): 23.94,20 23.94,1830 1820.58,1830 1820.58,20
GND on Mid1-Ver "RF_GND_L-03_P-001" (solid, pour order 1000): 16.06,907.87 300.03,907.87 300.03,412.99 16.06,412.99
GND on Bottom "GND_L04_P013" (solid, remove dead copper, pour order 1003): 24.72,20 24.72,1830 1818.97,1830 1818.97,20
GND on GND Plane (split plane): 1829.91,10.09 10.09,10.09 10.09,1842 1829.91,1842

## Other copper
Top:
  rectangle net VIN: 80,1315 130,1370
  region net SW: 1530.43,1002.42 1530.43,907.62 1645.59,907.62 1645.59,976.83 1599.33,976.83 1599.33,1002.42
  region net VIN_P: 1770.34,806.15 1756.38,806.15 1756.38,737.53 1827.86,737.53 1827.86,1023.7 1720.3,1023.7 1689.16,1023.7 1688.91,1023.37 1684.34,1023.48 1684.56,1009.66 1659.28,984.38 1659.28,921.02 1770.34,921.02
  region net +3.3V: 1599.55,1031.13 1592.8,1024.38 1489.33,1024.38 1483.03,1031.13 1413.8,1031.13 1413.8,1061.79 1495.86,1143.86 1495.86,1153 1519.48,1153 1519.48,1140.91 1561.52,1098.88 1561.52,1072.55 1602.93,1072.55 1602.93,1101.46 1641.65,1101.46 1641.65,1036.72 1636.07,1031.13
  region net VIN: 1540.57,736.25 1678.42,736.25 1678.42,806.22 1627.24,806.22 1540.57,806.22
Mid1-Ver:
  rectangle net +3.3V: 905,25 945,60
  rectangle net +3.3V: 1060,1755 1100,1790

## Silkscreen, mask and mechanical layers (free items; w line width, h text height)
Silkscreen Top:
  region: 1179.85,746.75 1192.19,747.09 1202.95,747.98 1211.28,749.1 1220.63,750.9 1225.75,752.21 1232.22,754.44 1236.41,756.59 1238.62,758 1240.17,759.22 1241.84,760.82 1242.92,762.42 1243.81,763.86 1244.34,765.28 1244.68,766.71 1244.8,768.08 1244.8,769.68 1244.62,770.81 1244.03,772.63 1243.33,774.21 1242.25,775.68 1240.45,777.59 1238.75,779.01 1236.73,780.41 1233.62,782.05 1230.17,783.65 1226.16,785.19 1222.23,786.5 1218.54,787.65 1214.93,788.64 1214.93,779.87 1220.43,778.31 1225.63,776.51 1229.92,774.68 1233.25,772.9 1234.56,771.84 1235.82,770.45 1236.27,769.54 1236.45,768.64 1236.45,767.67 1235.94,766.68 1235.01,765.65 1233.79,764.67 1232.46,763.82 1230.69,762.92 1228.65,762.04 1226.9,761.43 1224.98,760.75 1222.46,760.08 1219.57,759.27 1215.45,758.39 1211.12,757.62 1206.93,757.01 1201.16,756.36 1194.08,755.66 1179.85,755
  region: 1204.4,810.84 1204.4,759.9 1212.81,761.18 1212.81,812.13
  region: 1231.34,825.02 1222.66,824.73 1211.39,823.71 1205.91,822.97 1196.56,821.18 1191.44,819.86 1184.97,817.63 1180.78,815.48 1178.57,814.08 1177.02,812.85 1175.35,811.25 1174.27,809.65 1173.38,808.22 1172.85,806.8 1172.51,805.36 1172.39,803.99 1172.39,802.39 1172.57,801.26 1173.16,799.44 1173.86,797.86 1174.94,796.39 1176.74,794.48 1178.44,793.06 1180.46,791.66 1183.57,790.03 1187.02,788.43 1191.03,786.88 1194.96,785.57 1198.65,784.42 1202.26,783.43 1202.26,792.2 1196.76,793.76 1191.57,795.56 1187.27,797.4 1183.94,799.18 1182.63,800.24 1181.37,801.62 1180.92,802.54 1180.74,803.43 1180.74,804.41 1181.25,805.39 1182.18,806.42 1183.41,807.41 1184.74,808.25 1186.5,809.15 1188.55,810.03 1190.29,810.64 1192.21,811.32 1194.73,811.99 1197.62,812.8 1201.74,813.68 1206.07,814.45 1210.26,815.06 1216.03,815.71 1223.11,816.41 1232.26,816.92
  region: 1257.08,820.74 1235.89,833.27 1232.27,825.04 1231.29,825.04 1232.29,816.7 1235.71,808.67
  region: 1208.75,858.22 1196.23,837.03 1204.45,833.41 1204.45,826.06 1212.79,827.07 1212.79,833.43 1220.83,836.85
  region: 1204.4,744.71 1204.4,725.1 1212.81,725.1 1212.81,746
  region: 1305.16,790.13 cw(c1208.55,790.13) 1305.16,790.27 cw(c1300.93,790.26) 1305.16,790.26 cw(c1300.93,790.26) 1296.71,790.26 ccw(c1208.55,790.13) 1296.71,790.13 cw(c1300.93,790.13)
  text "TX0" at 1530,1750 h30
  text "RX0" at 1530,1650 h30
  text "IG-2.0-BRK" at 1827.83,1030.43 h65 r90
  text "1" at 9.68,780.18 h98.43
  text "2" at 9.68,448.32 h98.43
Silkscreen Bottom:
  text "'.PcbRevision'" at 1637.89,630.86 h80
Assembly Drawing Bottom:
  lines w1: 0,-150 0,1900 1840,1900 1840,-150 0,-150
Dimensions:
  drawing of 299 lines, arcs and shapes, not listed
  text "Layer" at 2382.02,1785.56 h60
  text "Name" at 2791.93,1785.56 h60
  text "Material" at 3961.6,1785.56 h60
  text "Thickness" at 4821.37,1785.56 h60
  text "Constant" at 5471.2,1785.56 h60
  text "Board Layer Stack" at 6041.06,1785.56 h60
  text "Silkscreen Top" at 2791.93,1665.56 h60
  text "Solder Mask Top" at 2791.93,1545.56 h60
  text "Solder Resist" at 3961.6,1545.56 h60
  text "0.40mil" at 4821.37,1545.56 h60
  text "3.5" at 5471.2,1545.56 h60
  text "1" at 2382.02,1425.56 h60
  text "Top" at 2791.93,1425.56 h60
  text "2.10mil" at 4821.37,1425.56 h60
  text "Dielectric1" at 2791.93,1305.56 h60
  text "PP-006" at 3961.6,1305.56 h60
  text "8.00mil" at 4821.37,1305.56 h60
  text "4.1" at 5471.2,1305.56 h60
  text "2" at 2382.02,1185.56 h60
  text "GND Plane" at 2791.93,1185.56 h60
  text "0.70mil" at 4821.37,1185.56 h60
  text "Dielectric3" at 2791.93,1065.56 h60
  text "Core-009" at 3961.6,1065.56 h60
  text "40.00mil" at 4821.37,1065.56 h60
  text "4.5" at 5471.2,1065.56 h60
  text "3" at 2382.02,945.56 h60
  text "Mid1-Ver" at 2791.93,945.56 h60
  text "0.70mil" at 4821.37,945.56 h60
  text "Dielectric2" at 2791.93,825.56 h60
  text "PP-006" at 3961.6,825.56 h60
  text "8.00mil" at 4821.37,825.56 h60
  text "4.1" at 5471.2,825.56 h60
  text "4" at 2382.02,705.56 h60
  text "Bottom" at 2791.93,705.56 h60
  text "2.10mil" at 4821.37,705.56 h60
  text "Solder Mask Bottom" at 2791.93,585.56 h60
  text "Solder Resist" at 3961.6,585.56 h60
  text "0.40mil" at 4821.37,585.56 h60
  text "3.5" at 5471.2,585.56 h60
  text "Silkscreen Bottom" at 2791.93,465.56 h60
Drill Drawing:
  text ".Legend" at 22.76,2670.87 h60

## Text inside footprints (layer, text, board x,y; h text height)
J4: Silkscreen Top "1" at 205,1350 h30; Silkscreen Top "13" at 820,1341.91 h30; Silkscreen Top "14" at 820,1620 h30; Silkscreen Top "2" at 210,1620 h30
J5: Silkscreen Top "1" at 1055,1341.91 h30; Silkscreen Top "13" at 1695,1355 h25; Silkscreen Top "14" at 1695,1625 h25; Silkscreen Top "2" at 1047.51,1622.51 h30
J6: Silkscreen Top "1" at 620,240 h30; Silkscreen Top "13" at 1405,235 h30; Silkscreen Top "14" at 1405,335 h30; Silkscreen Top "2" at 615,335 h30
J10: Silkscreen Top "2" at 1475,1650 h30; Silkscreen Top "1" at 1480,1750 h30
U1: Silkscreen Top "1" at 1017.4,1034.52 h40; Silkscreen Top "11" at 1017.4,534.52 h40; Silkscreen Top "12" at 1356.06,534.52 h40; Silkscreen Top "22" at 1355,1034.52 h40
U2: Silkscreen Top "32" at 704.43,1243.8 h40; Silkscreen Top "17" at 704.43,493.8 h40; Silkscreen Top "16" at 369.43,493.8 h40; Silkscreen Top "1" at 369.43,1243.8 h40